# EAGLE board MPR121-Breakout-Panel-v13 (EAGLE 7.3.0), part 1 of 5
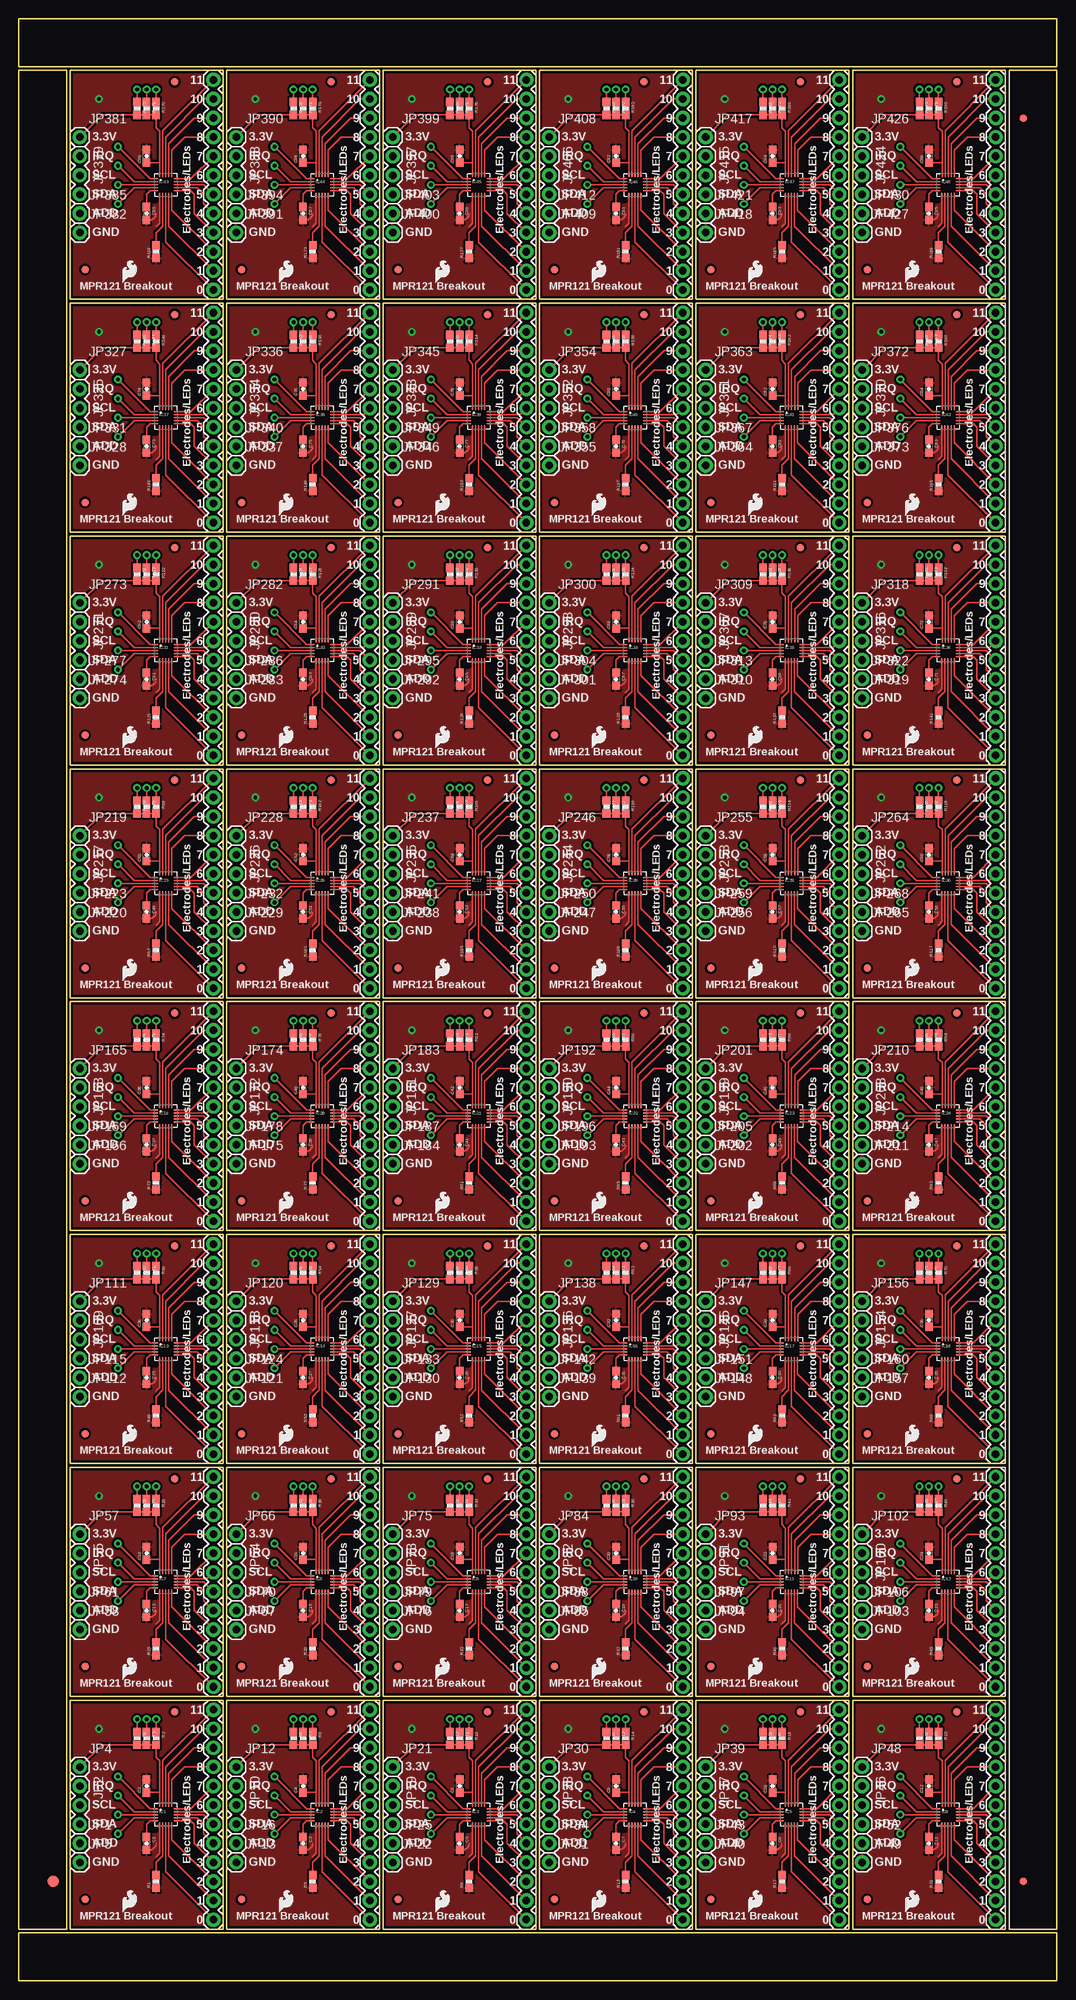
[diagram p0: board, top side]
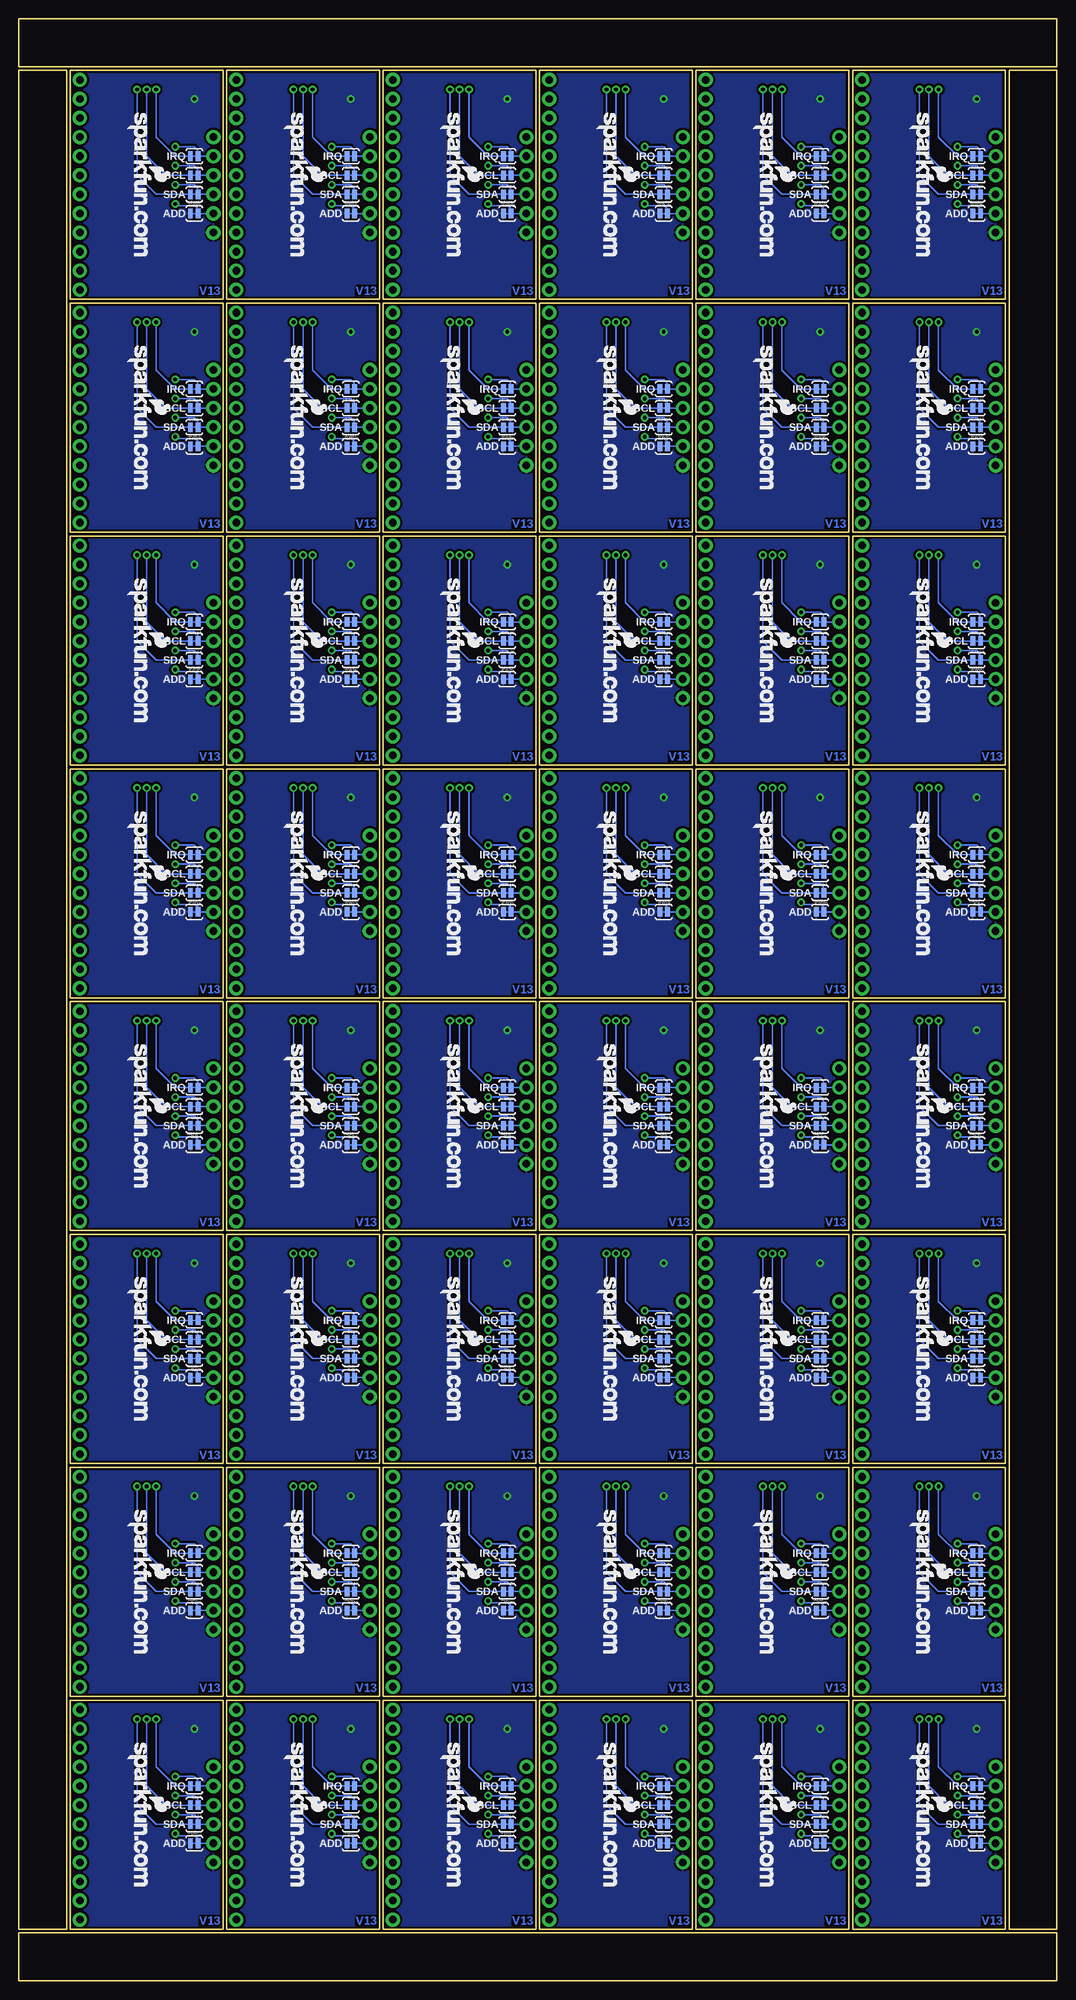
[diagram p1: board, bottom side, seen from below]

Size 138.18 x 261.11 mm. Coordinates in mm from the lower left corner, seen from the top.
Outline: 6.86,6.86 6.86,37.34 27.18,37.34 27.18,6.86 6.86,6.86
Outline: 27.69,6.86 27.69,37.34 48.01,37.34 48.01,6.86 27.69,6.86
Outline: 48.51,6.86 48.51,37.34 68.83,37.34 68.83,6.86 48.51,6.86
Outline: 69.34,6.86 69.34,37.34 89.66,37.34 89.66,6.86 69.34,6.86
Outline: 90.17,6.86 90.17,37.34 110.49,37.34 110.49,6.86 90.17,6.86
Outline: 111,6.86 111,37.34 131.32,37.34 131.32,6.86 111,6.86
Outline: 6.86,37.85 6.86,68.33 27.18,68.33 27.18,37.85 6.86,37.85
Outline: 27.69,37.85 27.69,68.33 48.01,68.33 48.01,37.85 27.69,37.85
Outline: 48.51,37.85 48.51,68.33 68.83,68.33 68.83,37.85 48.51,37.85
Outline: 69.34,37.85 69.34,68.33 89.66,68.33 89.66,37.85 69.34,37.85
Outline: 90.17,37.85 90.17,68.33 110.49,68.33 110.49,37.85 90.17,37.85
Outline: 111,37.85 111,68.33 131.32,68.33 131.32,37.85 111,37.85
Outline: 6.86,68.83 6.86,99.31 27.18,99.31 27.18,68.83 6.86,68.83
Outline: 27.69,68.83 27.69,99.31 48.01,99.31 48.01,68.83 27.69,68.83
Outline: 48.51,68.83 48.51,99.31 68.83,99.31 68.83,68.83 48.51,68.83
Outline: 69.34,68.83 69.34,99.31 89.66,99.31 89.66,68.83 69.34,68.83
Outline: 90.17,68.83 90.17,99.31 110.49,99.31 110.49,68.83 90.17,68.83
Outline: 111,68.83 111,99.31 131.32,99.31 131.32,68.83 111,68.83
Outline: 6.86,99.82 6.86,130.3 27.18,130.3 27.18,99.82 6.86,99.82
Outline: 27.69,99.82 27.69,130.3 48.01,130.3 48.01,99.82 27.69,99.82
Outline: 48.51,99.82 48.51,130.3 68.83,130.3 68.83,99.82 48.51,99.82
Outline: 69.34,99.82 69.34,130.3 89.66,130.3 89.66,99.82 69.34,99.82
Outline: 90.17,99.82 90.17,130.3 110.49,130.3 110.49,99.82 90.17,99.82
Outline: 111,99.82 111,130.3 131.32,130.3 131.32,99.82 111,99.82
Outline: 6.86,130.81 6.86,161.29 27.18,161.29 27.18,130.81 6.86,130.81
Outline: 27.69,130.81 27.69,161.29 48.01,161.29 48.01,130.81 27.69,130.81
Outline: 48.51,130.81 48.51,161.29 68.83,161.29 68.83,130.81 48.51,130.81
Outline: 69.34,130.81 69.34,161.29 89.66,161.29 89.66,130.81 69.34,130.81
Outline: 90.17,130.81 90.17,161.29 110.49,161.29 110.49,130.81 90.17,130.81
Outline: 111,130.81 111,161.29 131.32,161.29 131.32,130.81 111,130.81
Outline: 6.86,161.8 6.86,192.28 27.18,192.28 27.18,161.8 6.86,161.8
Outline: 27.69,161.8 27.69,192.28 48.01,192.28 48.01,161.8 27.69,161.8
Outline: 48.51,161.8 48.51,192.28 68.83,192.28 68.83,161.8 48.51,161.8
Outline: 69.34,161.8 69.34,192.28 89.66,192.28 89.66,161.8 69.34,161.8
Outline: 90.17,161.8 90.17,192.28 110.49,192.28 110.49,161.8 90.17,161.8
Outline: 111,161.8 111,192.28 131.32,192.28 131.32,161.8 111,161.8
Outline: 6.86,192.79 6.86,223.27 27.18,223.27 27.18,192.79 6.86,192.79
Outline: 27.69,192.79 27.69,223.27 48.01,223.27 48.01,192.79 27.69,192.79
Outline: 48.51,192.79 48.51,223.27 68.83,223.27 68.83,192.79 48.51,192.79
Outline: 69.34,192.79 69.34,223.27 89.66,223.27 89.66,192.79 69.34,192.79
Outline: 90.17,192.79 90.17,223.27 110.49,223.27 110.49,192.79 90.17,192.79
Outline: 111,192.79 111,223.27 131.32,223.27 131.32,192.79 111,192.79
Outline: 6.86,223.77 6.86,254.25 27.18,254.25 27.18,223.77 6.86,223.77
Outline: 27.69,223.77 27.69,254.25 48.01,254.25 48.01,223.77 27.69,223.77
Outline: 48.51,223.77 48.51,254.25 68.83,254.25 68.83,223.77 48.51,223.77
Outline: 69.34,223.77 69.34,254.25 89.66,254.25 89.66,223.77 69.34,223.77
Outline: 90.17,223.77 90.17,254.25 110.49,254.25 110.49,223.77 90.17,223.77
Outline: 111,223.77 111,254.25 131.32,254.25 131.32,223.77 111,223.77
Outline: 6.35,6.86 6.35,254.25 0,254.25 0,6.86 6.35,6.86
Outline: 0,0 138.18,0 138.18,6.35 0,6.35 0,0
Outline: 131.83,6.86 138.18,6.86 138.18,254.25 131.83,254.25 131.83,6.86
Outline: 138.18,261.11 0,261.11 0,254.76 138.18,254.76 138.18,261.11
Copper layers (1*16): Top 0.035mm / dielectric 1.5mm / Bottom 0.035mm
Design rules "default": minimum track width 8mil, minimum drill 20mil, track to track 8mil, track to pad 8mil, pad to pad 8mil, via to via 8mil, smd to smd 8mil, copper to edge 8mil, drill to drill 8mil, minimum pad ring 12mil, minimum via ring 10mil, stop-mask expansion 4mil, vias tented up to drill 20mil, thermal gap 10mil
tRestrict: area 18,19.9 to 18.3,20.6; area 38.9,19.9 to 39.1,20.6; area 59.7,19.9 to 59.9,20.6; area 80.5,19.9 to 80.8,20.6; area 101.3,19.9 to 101.6,20.6; area 122.2,19.9 to 122.4,20.6; area 18,50.9 to 18.3,51.6; area 38.9,50.9 to 39.1,51.6; area 59.7,50.9 to 59.9,51.6; area 80.5,50.9 to 80.8,51.6; area 101.3,50.9 to 101.6,51.6; area 122.2,50.9 to 122.4,51.6; area 18,81.9 to 18.3,82.5; area 38.9,81.9 to 39.1,82.5; area 59.7,81.9 to 59.9,82.5; area 80.5,81.9 to 80.8,82.5; area 101.3,81.9 to 101.6,82.5; area 122.2,81.9 to 122.4,82.5; area 18,112.9 to 18.3,113.5; area 38.9,112.9 to 39.1,113.5; area 59.7,112.9 to 59.9,113.5; area 80.5,112.9 to 80.8,113.5; area 101.3,112.9 to 101.6,113.5; area 122.2,112.9 to 122.4,113.5; area 18,143.9 to 18.3,144.5; area 38.9,143.9 to 39.1,144.5; area 59.7,143.9 to 59.9,144.5; area 80.5,143.9 to 80.8,144.5; area 101.3,143.9 to 101.6,144.5; area 122.2,143.9 to 122.4,144.5; area 18,174.9 to 18.3,175.5; area 38.9,174.9 to 39.1,175.5; area 59.7,174.9 to 59.9,175.5; area 80.5,174.9 to 80.8,175.5; area 101.3,174.9 to 101.6,175.5; area 122.2,174.9 to 122.4,175.5; area 18,205.9 to 18.3,206.5; area 38.9,205.9 to 39.1,206.5; area 59.7,205.9 to 59.9,206.5; area 80.5,205.9 to 80.8,206.5; area 101.3,205.9 to 101.6,206.5; area 122.2,205.9 to 122.4,206.5; area 18,236.9 to 18.3,237.5; area 38.9,236.9 to 39.1,237.5; area 59.7,236.9 to 59.9,237.5; area 80.5,236.9 to 80.8,237.5; area 101.3,236.9 to 101.6,237.5; area 122.2,236.9 to 122.4,237.5

## Footprints (pad centres in the part's own frame; a part is rotated, then mirrored left to right if it is on the bottom)
0603-CAP = smd 1.1 x 1: 1 -0.85,0; 2 0.85,0
FIDUCIAL-1.5X3 = smd 1.5 x 1.5: 1 0,0
FIDUCIAL-1X2 = smd 1 x 1: 1 0,0
QFN-20-0.4MM-V2 = smd 0.75 x 0.195: 1 -1.367,0.8; 2 -1.367,0.4; 3 -1.367,0; 4 -1.367,-0.4; 5 -1.367,-0.8; 11 1.375,-0.8; 12 1.375,-0.4; 13 1.375,0; 14 1.375,0.4; 15 1.375,0.8 | smd 0.195 x 0.75: 6 -0.795,-1.372; 7 -0.395,-1.372; 8 0.005,-1.372; 9 0.405,-1.372; 10 0.805,-1.372; 16 0.81,1.372; 17 0.41,1.372; 18 0.01,1.372; 19 -0.39,1.372; 20 -0.79,1.372
1X01 = drill 1.016 pad 1.88: 1 0,0
1X03 = drill 1.016 pad 1.88: 1 0,0; 2 2.54,0; 3 5.08,0
1X12 = drill 1.016 pad 1.88: 1 0,0; 2 2.54,0; 3 5.08,0; 4 7.62,0; 5 10.16,0; 6 12.7,0; 7 15.24,0; 8 17.78,0; 9 20.32,0; 10 22.86,0; 11 25.4,0; 12 27.94,0
0603-RES = smd 1.1 x 1: 1 -0.85,0; 2 0.85,0
SJ_2S-TRACE = smd 0.635 x 1.27: 1 -0.508,0; 2 0.508,0